# EAGLE board Caution_Panel_control (EAGLE 7.0.0)
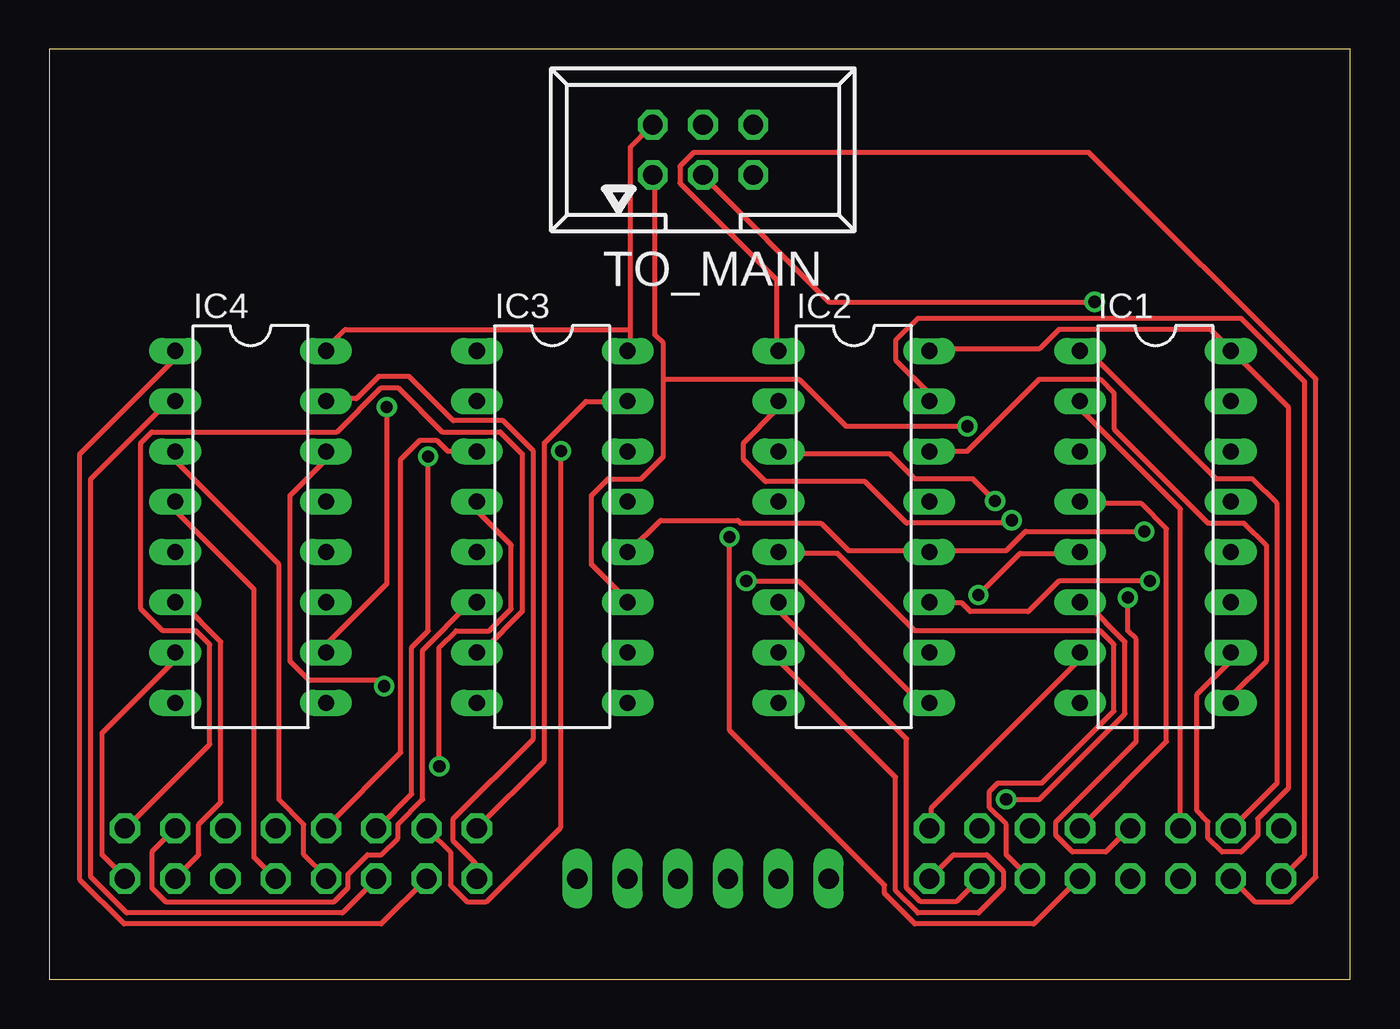
[diagram p0: board, top side]
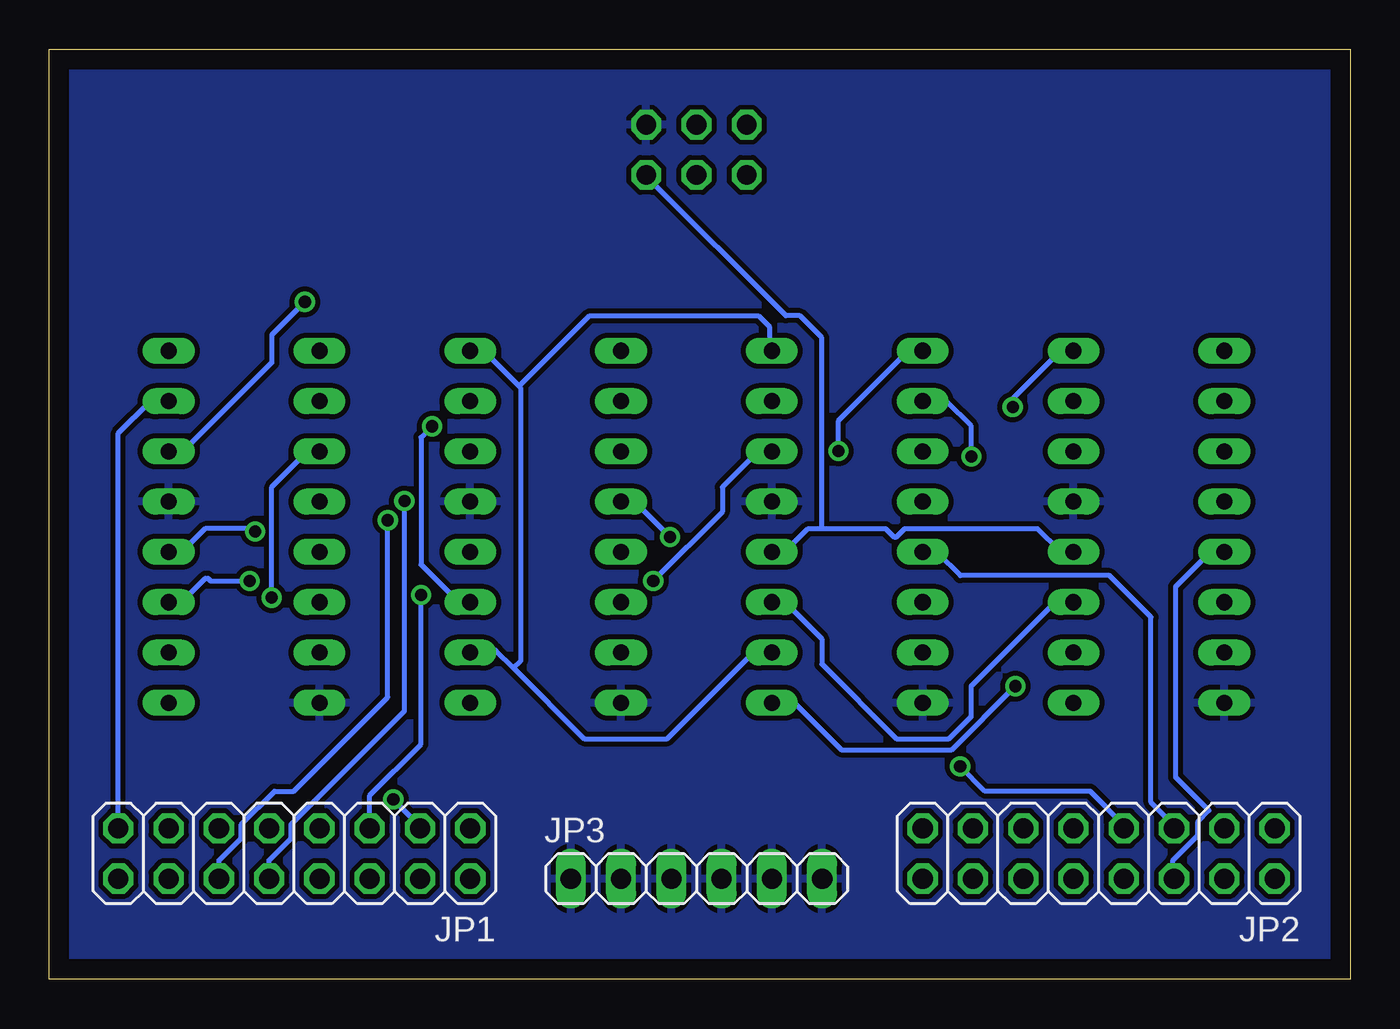
[diagram p1: board, bottom side, seen from below]

Size 65.71 x 46.98 mm. Coordinates in mm from the lower left corner, seen from the top.
Outline: 0,0 65.71,0 65.71,46.98 0,46.98 0,0
Copper layers (1*16): Top 0.035mm / dielectric 1.5mm / Bottom 0.035mm
Design rules "default": minimum track width 10mil, minimum drill 24mil, track to track 8mil, track to pad 8mil, pad to pad 8mil, via to via 8mil, smd to smd 8mil, copper to edge 40mil, drill to drill 8mil, minimum pad ring 10mil, minimum via ring 8mil, stop-mask expansion 4mil, vias tented up to drill 0mil, thermal gap 10mil
Net classes: 0 default: width 0.254 mm, drill 0.254 mm, clearance 0.305 mm; 1 Signal: width 0.152 mm, drill 0.152 mm, clearance 0.152 mm; 2 Power: width 0.254 mm, drill 0.254 mm, clearance 0.254 mm

## Footprints (pad centres in the part's own frame; a part is rotated, then mirrored left to right if it is on the bottom)
DIL16 = drill 0.813 long: 1 -8.89,-3.81; 2 -6.35,-3.81; 3 -3.81,-3.81; 4 -1.27,-3.81; 5 1.27,-3.81; 6 3.81,-3.81; 7 6.35,-3.81; 8 8.89,-3.81; 9 8.89,3.81; 10 6.35,3.81; 11 3.81,3.81; 12 1.27,3.81; 13 -1.27,3.81; 14 -3.81,3.81; 15 -6.35,3.81; 16 -8.89,3.81
2X08 = drill 1.016 octagon: 1 -8.89,-1.27; 2 -8.89,1.27; 3 -6.35,-1.27; 4 -6.35,1.27; 5 -3.81,-1.27; 6 -3.81,1.27; 7 -1.27,-1.27; 8 -1.27,1.27; 9 1.27,-1.27; 10 1.27,1.27; 11 3.81,-1.27; 12 3.81,1.27; 13 6.35,-1.27; 14 6.35,1.27; 15 8.89,-1.27; 16 8.89,1.27
1X06 = drill 1.016 long: 1 -6.35,0; 2 -3.81,0; 3 -1.27,0; 4 1.27,0; 5 3.81,0; 6 6.35,0
057-006-1 = drill 1 octagon: 1 -2.54,-1.27; 2 -2.54,1.27; 3 0,-1.27; 4 0,1.27; 5 2.54,-1.27; 6 2.54,1.27

## Placement (x,y rotation side)
IC1  74HC595N  [DIL16]  55.88,22.86 270 top
IC2  74HC595N  [DIL16]  40.64,22.86 270 top
IC3  74HC595N  [DIL16]  25.4,22.86 270 top
IC4  74HC595N  [DIL16]  10.16,22.86 270 top
JP1  [2X08]  53.34,6.35 180 bottom
JP2  [2X08]  12.7,6.35 180 bottom
JP3  [1X06]  33.02,5.08 0 bottom
TO_MAIN  057-006-1  [057-006-1]  33.02,41.91 0 top

## Library data of the parts
IC1-IC4 = 74xx-eu
JP1-JP3 = pinhead
TO_MAIN = con-panduit; OC_FARNELL: unknown; OC_NEWARK: unknown

## Nets
+5V [Power]: IC1.10 IC1.16 IC2.10 IC2.16 IC3.10 IC3.16 IC4.10 IC4.16 TO_MAIN.2
CAUTION_LATCH [Signal]: IC1.12 IC2.12 IC3.12 IC4.12 TO_MAIN.5
DATA_IC2 [Signal]: IC1.9 IC2.14
DATA_IC3 [Signal]: IC2.9 IC3.14
DATA_IC4 [Signal]: IC3.9 IC4.14
GND [Power]: IC1.8 IC1.13 IC2.8 IC2.13 IC3.8 IC3.13 IC4.8 IC4.13 JP3.1 JP3.2 JP3.3 JP3.4 JP3.5 JP3.6 TO_MAIN.6
LIGHT_CLK [Signal]: IC1.11 IC2.11 IC3.11 IC4.11 TO_MAIN.1
LIGHT_DATA [Signal]: IC1.14 TO_MAIN.3
N$1 [Signal]: IC1.15 JP1.15
N$2 [Signal]: IC1.1 JP1.13
N$3 [Signal]: IC1.2 JP1.11
N$4 [Signal]: IC1.3 JP1.9
N$5 [Signal]: IC1.4 JP1.7
N$6 [Signal]: IC1.5 JP1.5
N$7 [Signal]: IC1.6 JP1.3
N$8 [Signal]: IC1.7 JP1.1
N$9 [Signal]: IC2.15 JP1.16
N$10 [Signal]: IC2.1 JP1.14
N$11 [Signal]: IC2.2 JP1.12
N$12 [Signal]: IC2.3 JP1.10
N$13 [Signal]: IC2.4 JP1.8
N$14 [Signal]: IC2.5 JP1.6
N$15 [Signal]: IC2.6 JP1.4
N$16 [Signal]: IC2.7 JP1.2
N$17 [Signal]: IC4.7 JP2.2
N$18 [Signal]: IC4.6 JP2.4
N$19 [Signal]: IC4.5 JP2.6
N$20 [Signal]: IC4.4 JP2.8
N$21 [Signal]: IC4.3 JP2.10
N$22 [Signal]: IC4.2 JP2.12
N$23 [Signal]: IC4.1 JP2.14
N$24 [Signal]: IC4.15 JP2.16
N$25 [Signal]: IC3.7 JP2.1
N$26 [Signal]: IC3.5 JP2.5
N$27 [Signal]: IC3.6 JP2.3
N$28 [Signal]: IC3.4 JP2.7
N$29 [Signal]: IC3.3 JP2.9
N$30 [Signal]: IC3.2 JP2.11
N$31 [Signal]: IC3.1 JP2.13
N$32 [Signal]: IC3.15 JP2.15

## Tracks (layer width: path | path; a pad name or v marks a point on that pad's centre or on a via)
+5V  (via drill 0.61)
  Top 0.254: 29.34,32.83 29.34,42.05 30.45,43.17 TO_MAIN.2 | 29.34,32.83 29.34,31.85 IC3.16 | IC4.10 13.97,16.9 17.04,19.98 v17.04,28.92 | 29.34,32.83 14.95,32.83 13.97,31.85 IC4.16 | IC2.16 44.56,31.85 50.01,31.85 50.99,32.83 58.67,32.83 59.65,31.85 IC1.16 59.79,31.71 62.59,28.92 62.59,9.64 61.05,8.1 61.05,7.26 60.21,6.43 59.23,6.43 58.53,7.12 58.53,7.96 57.98,8.52 57.98,14.39 59.65,16.07 59.65,16.48 IC1.10
  Bottom 0.254: v17.04,28.92 17.04,29.34 14.67,31.71 13.97,31.71 IC4.16 | 42.26,15.72 43.17,16.62 44.42,16.62 IC2.10 | 42.26,15.72 38.7,12.15 34.51,12.15 30.18,16.48 29.34,16.48 IC3.10 | 42.26,15.72 41.91,16.07 41.91,29.9 41.98,29.97 | 41.98,29.97 43.73,31.71 44.42,31.71 IC2.16 | 41.98,29.97 38.42,33.53 29.9,33.53 29.34,32.97 29.34,31.85 IC3.16
CAUTION_LATCH  (via drill 0.61)
  Top 0.254: IC3.12 29.34,21.65 30.87,23.19 34.78,23.19 34.92,23.05 38.98,23.05 40.37,21.65 44.42,21.65 IC2.12 44.56,21.65 48.34,21.65 49.31,22.63 v55.32,22.63
  Bottom 0.254: 26.68,22.77 27.38,22.77 28.5,21.65 29.2,21.65 IC3.12 | 26.68,22.77 23.47,22.77 23.05,22.35 22.91,22.35 22.49,22.77 15.79,22.77 14.67,21.65 13.97,21.65 IC4.12 | v55.32,22.63 55.46,22.77 57.84,22.77 58.95,21.65 59.65,21.65 IC1.12 | 26.68,22.77 26.68,32.41 27.8,33.53 28.5,33.53 35.48,40.51 TO_MAIN.5
DATA_IC2
  Top 0.254: IC1.9 59.79,13.97 59.79,14.39 61.47,16.07 61.47,21.93 60.35,23.05 58.53,23.05 53.78,27.8 53.78,29.62 53.09,30.32 50.01,30.32 46.38,26.68 44.56,26.68 IC2.14
DATA_IC3  (via drill 0.61)
  Top 0.254: IC2.9 44.01,13.97 37.86,20.12 v35.2,20.12
  Bottom 0.254: v35.2,20.12 31.71,23.61 31.71,24.87 30.04,26.54 29.34,26.54 IC3.14
DATA_IC4  (via drill 0.61)
  Top 0.254: IC4.14 13.97,26.26 12.15,24.45 12.15,16.07 13.13,15.09 16.62,15.09 v16.9,14.81
  Bottom 0.254: v16.9,14.81 20.12,11.6 25.7,11.6 28.08,13.97 IC3.9
GND
  pour Bottom: -1.27,48.26 67.31,48.26 67.31,-1.27 -1.27,-1.27
LIGHT_CLK  (via drill 0.61)
  Top 0.254: v55.6,20.12 50.99,20.12 49.45,18.58 46.52,18.58 46.1,19 44.56,19 IC2.11 | 31.01,30.32 31.01,26.4 29.9,25.29 28.22,25.29 27.38,24.45 27.38,20.95 29.2,19.14 IC3.11 | 31.01,30.32 31.01,32.13 30.59,32.55 30.59,40.51 TO_MAIN.1 | v46.38,27.94 40.23,27.94 37.86,30.32 31.01,30.32
  Bottom 0.254: v55.6,20.12 57.56,20.12 57.7,20.26 57.84,20.26 58.95,19.14 59.65,19.14 IC1.11 | IC4.11 13.97,19 14.95,19 19.14,14.81 19.14,13.27 20.26,12.15 22.91,12.15 26.68,15.93 26.68,17.18 28.5,19 29.2,19 IC3.11 | v46.38,27.94 46.94,27.38 46.94,20.95 45.12,19.14 44.56,19.14 IC2.11
LIGHT_DATA  (via drill 0.61)
  Top 0.254: v52.81,34.23 39.4,34.23 33.11,40.51 TO_MAIN.3
  Bottom 0.254: v52.81,34.23 54.48,32.55 54.48,31.15 58.95,26.68 59.65,26.68 IC1.14
N$1
  Bottom 0.254: IC1.15 59.79,29.2 60.63,29.2 62.23,27.6 JP1.15
N$2
  Top 0.254: IC1.1 52.11,31.71 52.53,31.71 58.95,25.29 60.77,25.29 62.03,24.03 62.03,9.92 59.79,7.68 JP1.13
N$3
  Top 0.254: IC1.2 52.11,29.2 52.11,28.78 57.14,23.75 57.14,7.68 JP1.11
N$4  (via drill 0.61)
  Top 0.254: v54.48,19.28 54.48,17.6 54.9,17.18 54.9,12.01 50.85,7.96 50.85,7.26 51.69,6.43 53.37,6.43 54.48,7.54 JP1.9
  Bottom 0.254: v54.48,19.28 54.48,24.87 52.81,26.54 52.11,26.54 IC1.3
N$5
  Top 0.254: IC1.4 52.11,24.03 55.18,24.03 56.44,22.77 56.44,12.01 52.11,7.68 JP1.7
N$6  (via drill 0.61)
  Top 0.254: v46.94,19.42 49.03,21.51 51.97,21.51 IC1.5
  Bottom 0.254: v46.94,19.42 46.94,11.87 49.53,9.28 JP1.5
N$7  (via drill 0.61)
  Top 0.254: v48.34,9.08 50.01,9.08 54.34,13.41 54.34,17.04 52.39,19 52.11,19 IC1.6
  Bottom 0.254: v48.34,9.08 46.94,7.68 JP1.3
N$8
  Top 0.254: IC1.7 51.97,16.48 51.97,16.07 44.56,8.66 44.56,7.68 JP1.1
N$9
  Top 0.254: IC2.15 44.42,29.34 44.42,29.62 42.75,31.29 42.75,32.27 43.87,33.39 60.21,33.39 63.42,30.18 63.42,6.29 62.31,5.17 JP1.16
N$10
  Top 0.254: IC2.1 36.74,31.85 36.74,35.34 31.85,40.23 31.85,41.07 32.55,41.77 52.53,41.77 63.98,30.32 63.98,5.17 62.73,3.91 60.91,3.91 59.79,5.03 JP1.14
N$11  (via drill 0.61)
  Top 0.254: v48.62,23.19 48.48,23.05 43.31,23.05 41.21,25.15 36.18,25.15 35.06,26.26 35.06,27.1 36.74,28.78 36.74,29.2 IC2.2
  Bottom 0.254: v48.62,23.19 48.62,14.25 53.37,9.5 54.34,9.5 56.02,7.82 56.02,7.12 57.14,6.01 57.14,5.17 JP1.12
N$12  (via drill 0.61)
  Top 0.254: v47.78,24.17 46.66,25.29 43.73,25.29 42.47,26.54 36.88,26.54 IC2.3
  Bottom 0.254: v47.78,24.17 47.78,13.55 53.51,7.82 53.51,7.12 54.62,6.01 54.62,5.17 JP1.10
N$13  (via drill 0.61)
  Top 0.254: v34.37,22.35 34.37,12.57 42.19,4.75 42.19,4.33 43.73,2.79 49.73,2.79 51.97,5.03 JP1.8
  Bottom 0.254: v34.37,22.35 36.04,24.03 36.74,24.03 IC2.4
N$14
  Top 0.254: IC2.5 36.88,21.51 39.81,21.51 43.73,17.6 53.09,17.6 53.78,16.9 53.78,13.55 50.15,9.92 47.92,9.92 47.5,9.5 47.5,8.66 48.34,7.82 48.34,6.29 49.45,5.17 JP1.6
N$15
  Top 0.254: JP1.4 45.82,3.91 44.01,3.91 43.31,4.61 43.31,12.15 36.88,18.58 36.88,19 IC2.6
N$16
  Top 0.254: IC2.7 36.88,16.48 36.88,16.07 42.75,10.2 42.75,4.47 43.87,3.35 46.94,3.35 48.2,4.61 48.2,5.45 47.36,6.29 45.68,6.29 44.56,5.17 JP1.2
N$17
  Top 0.254: IC4.7 6.29,16.48 6.29,16.07 2.65,12.43 2.65,6.29 3.77,5.17 JP2.2
N$18
  Top 0.254: IC4.6 6.43,19 6.71,19 8.66,17.04 8.66,8.94 7.54,7.82 7.54,6.29 6.43,5.17 JP2.4
N$19
  Bottom 0.254: IC4.5 6.43,21.51 7.12,21.51 8.8,19.84 8.8,10.2 7.12,8.52 7.68,7.96 7.68,7.26 8.94,6.01 8.94,5.17 JP2.6
N$20
  Top 0.254: IC4.4 6.43,24.03 6.43,23.61 10.34,19.7 10.34,6.15 11.32,5.17 JP2.8
N$21
  Top 0.254: IC4.3 6.43,26.54 6.43,26.12 11.6,20.95 11.6,9.08 12.85,7.82 12.85,6.29 13.97,5.17 JP2.10
N$22
  Top 0.254: IC4.2 6.29,29.2 6.01,29.2 2.1,25.29 2.1,5.17 3.91,3.35 14.81,3.35 16.48,5.03 JP2.12
N$23
  Top 0.254: JP2.14 16.76,2.79 3.77,2.79 1.54,5.03 1.54,26.54 6.29,31.29 6.29,31.71 IC4.1
N$24
  Top 0.254: IC4.15 13.97,29.34 15.51,29.34 16.62,30.45 18.16,30.45 20.4,28.22 22.91,28.22 24.45,26.68 24.45,12.15 20.4,8.1 20.4,6.99 21.51,5.87 21.51,5.17 JP2.16
N$25
  Top 0.254: IC3.7 21.65,16.62 21.93,16.62 23.89,18.58 23.89,26.54 22.77,27.66 19.84,27.66 17.6,29.9 16.76,29.9 14.53,27.66 5.17,27.66 4.61,27.1 4.61,18.72 5.73,17.6 7.4,17.6 8.1,16.9 8.1,11.87 3.91,7.68 JP2.1
N$26
  Bottom 0.254: IC3.5 21.51,21.51 20.82,21.51 19.7,20.4 12.15,20.4 10.06,18.3 10.06,8.94 8.8,7.68 JP2.5
N$27
  Top 0.254: IC3.6 21.51,19 21.23,19 18.86,16.62 18.86,9.08 17.6,7.82 17.6,7.12 16.76,6.29 16.07,6.29 15.09,5.31 15.09,4.61 14.39,3.91 5.87,3.91 5.17,4.61 5.17,6.43 6.29,7.54 JP2.3
N$28  (via drill 0.61)
  Top 0.254: v19.7,10.76 19.7,16.76 20.54,17.6 22.21,17.6 23.33,18.72 23.33,21.93 21.65,23.61 21.65,24.03 IC3.4
  Bottom 0.254: v19.7,10.76 18.44,9.5 13.13,9.5 11.32,7.68 JP2.7
N$29
  Top 0.254: IC3.3 21.51,26.68 20.12,26.68 19.56,27.24 18.72,27.24 17.74,26.26 17.74,11.46 13.97,7.68 JP2.9
N$30  (via drill 0.61)
  Top 0.254: v19.14,26.4 19.14,17.6 18.3,16.76 18.3,9.36 16.62,7.68 JP2.11
  Bottom 0.254: v19.14,26.4 19.14,27.94 20.4,29.2 21.51,29.2 IC3.2
N$31  (via drill 0.61)
  Top 0.254: v25.84,26.68 25.84,7.68 22.07,3.91 21.09,3.91 20.26,4.75 20.26,6.43 19.14,7.54 JP2.13
  Bottom 0.254: v25.84,26.68 25.84,28.22 22.35,31.71 21.65,31.71 IC3.1
N$32
  Top 0.254: JP2.15 25.01,11.04 25.01,27.1 27.1,29.2 29.2,29.2 IC3.15